# Altium PCB CAADIOPCBV1.01-ADAPTADOR-MICRO-DIP28.PcbDoc
Units mm, origin at the board's own origin, x right, y up, seen from the top; angles counter-clockwise.
Board outline 10.37 x 17.46 mm, 2 copper layers (Top Layer, Bottom Layer); 1 components, 28 nets, 56 pads, 20 vias.
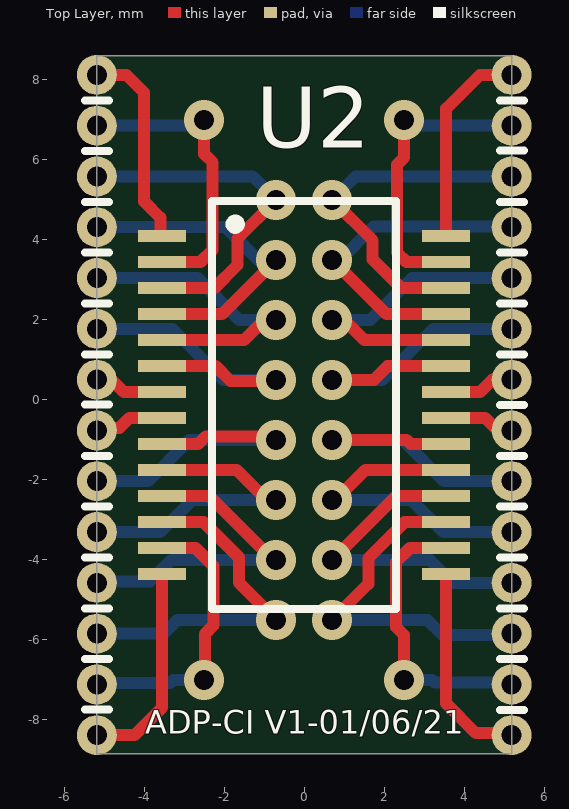
[diagram p0: Top Layer view]
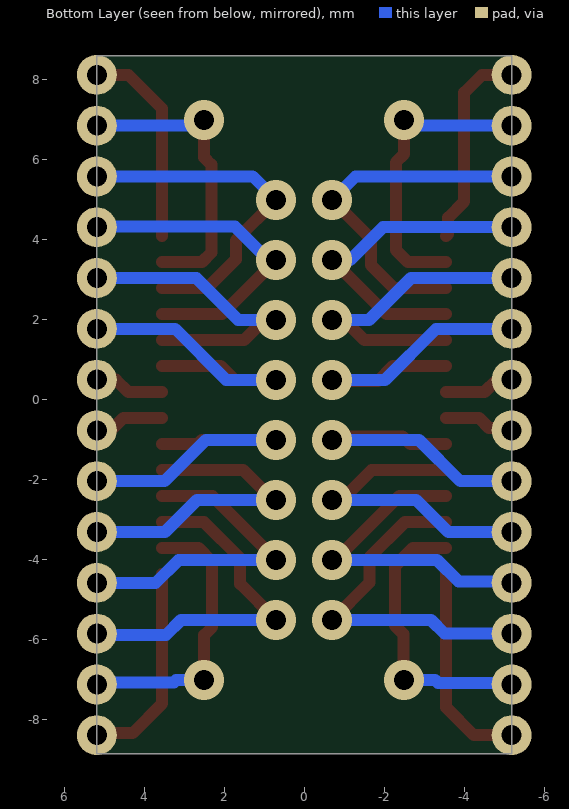
[diagram p1: Bottom Layer view, seen from below]

## Layer stack, top to bottom
Top Solder: solder mask 0.0102, Solder Resist, Dk 3.5
Top Layer: signal copper 0.0356
Dielectric 1: dielectric 0.32, FR-4, Dk 4.8
Bottom Layer: signal copper 0.0356
Bottom Solder: solder mask 0.0102, Solder Resist, Dk 3.5

## Board outline
-5.185,-8.85 -5.185,8.61 5.185,8.61 5.185,-8.85

## Design rules (kind name [scope] priority, off if disabled: settings)
Clearance [All] p1: gap=0.254 ignorepadtopadclearanceinfootprint=FALSE except(0: Arc-Hole Track-Hole SMDPad-Hole THPad-Hole Via-Hole Fill-Hole Poly-Hole Region-Hole Text-Hole)
PolygonConnect [All] p1: connectstyle=Relief reliefconductorwidth=0.254 reliefentries=4 polygonreliefangle="90 Angle" airgapwidth=0.254
RoutingVias [All] p1: holewidth=0.5 width=1 viastyle="Through Hole" minholewidth=0.5 minwidth=1 maxholewidth=0.5 maxwidth=1
SolderMaskExpansion [All] p1: expansion=0.102
Width [All] p1: maxlimit=1 minlimit=0.3 preferedwidth=1 minimp=50.000000 maximp=50.000000 favimp=50.000000
30 further rules are at their usual default settings.

## Components (designator, comment, footprint, x,y, rotation, side; value= is the part's Value field where it differs from the comment)
U2 "PIC18F26K80-I/SS" SSOP-28 0,-0.127 r0 top

## Footprints (in the part's own frame and the unit in brackets; to place one, negate y for a bottom-side part, rotate by r counter-clockwise, add the part's x,y. Pads: shape width x height; smd on the part's side, far side on the other; paste and mask are expansions set on the pad)
SSOP-28 [mm] "28P"
  rect 1.2x0.3 smd: 1(-3.55,4.225) 2(-3.55,3.575) 3(-3.55,2.925) 4(-3.55,2.275) 5(-3.55,1.625) 6(-3.55,0.975) 7(-3.55,0.325) 8(-3.55,-0.325) 9(-3.55,-0.975) 10(-3.55,-1.625) 11(-3.55,-2.275) 12(-3.55,-2.925) 13(-3.55,-3.575) 14(-3.55,-4.225) 15(3.55,-4.225) 16(3.55,-3.575) 17(3.55,-2.925) 18(3.55,-2.275) 19(3.55,-1.625) 20(3.55,-0.975) 21(3.55,-0.325) 22(3.55,0.325) 23(3.55,0.975) 24(3.55,1.625) 25(3.55,2.275) 26(3.55,2.925) 27(3.55,3.575) 28(3.55,4.225)
  silkscreen extent -2.3,-5.1 2.3,5.1, body extent -3.9,-5.1 3.9,5.1, height 2

## Part data
U2: "Microcontrolador", Manufacturer_Name=Microchip, Mouser Part Number=579-PIC18F26K80-I/SS, Arrow Part Number=PIC18F26K80-I/SS, Arrow Price/Stock=https://www.arrow.com/en/products/pic18f26k80-iss/microchip-technology, Datasheet Link=http://docs-emea.rs-online.com/webdocs/0f3b/0900766b80f3b175.pdf, Height=2mm, Manufacturer_Part_Number=PIC18F26K80-I/SS, Mouser Price/Stock=https://www.mouser.co.uk/ProductDetail/Microchip-Technology/PIC18F26K80-I-SS/?qs=LU7oW20kJpONdJWw7q21%2Fw%3D%3D

## Free pads (board coordinates)
  round 1 hole 0.5: 1(-5.185,8.128) 2(-5.185,6.858) 3(-5.185,5.588) 4(-5.185,4.318) 5(-5.185,3.048) 6(-5.185,1.778) 7(-5.185,0.508) 8(-5.185,-0.762) 9(-5.185,-2.032) 10(-5.185,-3.302) 11(-5.185,-4.572) 12(-5.185,-5.842) 13(-5.185,-7.112) 14(-5.185,-8.382) 15(5.185,-8.382) 16(5.185,-7.112) 17(5.185,-5.842) 18(5.185,-4.572) 19(5.185,-3.302) 20(5.185,-2.032) 21(5.185,-0.762) 22(5.185,0.508) 23(5.185,1.778) 24(5.185,3.048) 25(5.185,4.318) 26(5.185,5.588) 27(5.185,6.858) 28(5.185,8.128)

## Via types
v1: diameter 1, hole 0.5, Top Layer to Bottom Layer, 20 vias

## Nets (pads, with @x,y where several pads share a name; then routed paths per layer and width w, separated by ;. In a path a pad name is that pad's centre, name@x,y a point inside that pad or via, vN(x,y) a via of type N, cw(c..) or ccw(c..) an arc to the next point about the centre after c; other vN are vias at no path point)
P1: pad.1 U2.1 | length 5.1
  Top Layer w0.3: pad.1 -4.448,8.128 -4,7.68 -4,4.96 -3.599,4.559 -3.599,4.147 U2.1
P2: pad.2 U2.2 | length 7.5
  Top Layer w0.3: U2.2 -2.592,3.448 -2.29,3.75 -2.29,5.94 -2.5,6.15 v1(-2.5,7)
  Bottom Layer w0.3: pad.2 -2.642,6.858 v1(-2.5,7)
P3: pad.3 U2.3 | length 8.9
  Top Layer w0.3: U2.3 -2.242,2.798 -1.67,3.37 -1.67,4.03 v1(-0.7,5)
  Bottom Layer w0.3: pad.3 -1.288,5.588 v1(-0.7,5)
P4: pad.4 U2.4 | length 8.2
  Top Layer w0.3: U2.4 -2.052,2.148 v1(-0.7,3.5)
  Bottom Layer w0.3: pad.4 -1.968,4.318 -1.15,3.5 v1(-0.7,3.5)
P5: pad.5 U2.5 | length 7.7
  Top Layer w0.3: U2.5 -1.502,1.498 v1@-1,2
  Bottom Layer w0.3: pad.5 -2.668,3.048 -1.62,2 v1(-0.7,2)
P6: pad.6 U2.6 | length 8
  Top Layer w0.3: U2.6 -2.218,0.848 -1.84,0.47 -0.73,0.47 v1(-0.7,0.5)
  Bottom Layer w0.3: pad.6 -3.298,1.778 -2.02,0.5 v1(-0.7,0.5)
P7: pad.7 U2.7 | length 1.8
  Top Layer w0.3: pad.7 -4.818,0.508 -4.508,0.198 U2.7
P8: pad.8 U2.8 | length 1.8
  Top Layer w0.3: pad.8 -5.123,-0.7 -4.62,-0.7 -4.372,-0.452 U2.8
P9: pad.9 U2.9 | length 7.6
  Top Layer w0.3: U2.9 -2.652,-1.102 -2.46,-0.91 -1.09,-0.91 v1@-1,-1
  Bottom Layer w0.3: pad.9 -3.902,-2.032 -2.87,-1 v1(-0.7,-1)
P10: pad.10 U2.10 | length 8
  Top Layer w0.3: U2.10 -1.688,-1.752 -0.94,-2.5 v1(-0.7,-2.5)
  Bottom Layer w0.3: pad.10 -3.602,-3.302 -2.8,-2.5 v1(-0.7,-2.5)
P11: pad.11 U2.11 | length 8.2
  Top Layer w0.3: U2.11 -2.376,-2.402 -0.778,-4 v1(-0.7,-4)
  Bottom Layer w0.3: pad.11 -5.153,-4.54 -3.86,-4.54 -3.32,-4 v1(-0.7,-4)
P12: pad.12 U2.12 | length 8.9
  Top Layer w0.3: U2.12 -2.518,-3.052 -1.63,-3.94 -1.63,-4.57 v1(-0.7,-5.5)
  Bottom Layer w0.3: pad.12 -3.512,-5.842 -3.17,-5.5 v1(-0.7,-5.5)
P13: pad.13 U2.13 | length 7.1
  Top Layer w0.3: U2.13 -2.718,-3.702 -2.27,-4.15 -2.27,-5.64 -2.48,-5.85 -2.48,-6.98 v1(-2.5,-7)
  Bottom Layer w0.3: pad.13 -5.153,-7.08 -3.35,-7.08 -3.27,-7 v1(-2.5,-7)
P14: pad.14 U2.14 | length 5.3
  Top Layer w0.3: pad.14 -4.242,-8.382 -3.55,-7.69 U2.14
P15: pad.15 U2.15 | length 5.2
  Top Layer w0.3: U2.15 3.55,-7.59 4.29,-8.33 5.133,-8.33 pad.15
P16: pad.16 U2.16 | length 7.2
  Top Layer w0.3: v1(2.5,-7) 2.5,-5.88 2.3,-5.68 2.3,-4.045 2.643,-3.702 U2.16
  Bottom Layer w0.3: v1(2.5,-7) 3.2,-7 3.26,-7.06 5.133,-7.06 pad.16
P17: pad.17 U2.17 | length 8.9
  Top Layer w0.3: v1(0.7,-5.5) 1.604,-4.596 1.604,-3.958 2.51,-3.052 U2.17
  Bottom Layer w0.3: v1(0.7,-5.5) 3.08,-5.5 3.46,-5.88 5.147,-5.88 pad.17
P18: pad.18 U2.18 | length 8.2
  Top Layer w0.3: v1(0.7,-4) 2.298,-2.402 U2.18
  Bottom Layer w0.3: v1(0.7,-4) 3.14,-4 3.712,-4.572 pad.18
P19: pad.19 U2.19 | length 8
  Top Layer w0.3: v1(0.7,-2.5) 0.778,-2.5 1.526,-1.752 U2.19
  Bottom Layer w0.3: v1(0.7,-2.5) 2.68,-2.5 3.482,-3.302 pad.19
P20: pad.20 U2.20 | length 7.5
  Top Layer w0.3: v1@1,-1 2.56,-1 2.662,-1.102 U2.20
  Bottom Layer w0.3: v1(0.7,-1) 2.46,-1 3.492,-2.032 pad.20
P21: pad.21 U2.21 | length 1.8
  Top Layer w0.3: U2.21 4.522,-0.452 4.832,-0.762 pad.21
P22: pad.22 U2.22 | length 1.8
  Top Layer w0.3: U2.22 4.398,0.198 4.708,0.508 pad.22
P23: pad.23 U2.23 | length 8
  Top Layer w0.3: v1(0.7,0.5) 1.74,0.5 2.088,0.848 U2.23
  Bottom Layer w0.3: v1(0.7,0.5) 1.95,0.5 3.228,1.778 pad.23
P24: pad.24 U2.24 | length 7.7
  Top Layer w0.3: v1@1,2 1.502,1.498 U2.24
  Bottom Layer w0.3: v1(0.7,2) 1.65,2 2.698,3.048 pad.24
P25: pad.25 U2.25 | length 8.2
  Top Layer w0.3: v1(0.7,3.5) 2.052,2.148 U2.25
  Bottom Layer w0.3: v1(0.7,3.5) 0.9,3.5 1.73,4.33 5.173,4.33 pad.25
P26: pad.26 U2.26 | length 8.8
  Top Layer w0.3: v1(0.7,5) 1.71,3.99 1.71,3.51 2.422,2.798 U2.26
  Bottom Layer w0.3: v1(0.7,5) 1.288,5.588 pad.26
P27: pad.27 U2.27 | length 7.5
  Top Layer w0.3: v1(2.5,7) 2.5,6.06 2.32,5.88 2.32,3.683 2.555,3.448 U2.27
  Bottom Layer w0.3: v1(2.5,7) 2.642,6.858 pad.27
P28: pad.28 U2.28 | length 5.2
  Top Layer w0.3: U2.28 3.55,7.28 4.398,8.128 pad.28

## Silkscreen, mask and mechanical layers (free items; w line width, h text height)
Top Overlay:
  lines w0.2: -5.48,-7.74 -4.88,-7.74 ; -5.48,-6.48 -4.88,-6.48 ; -5.48,-5.21 -4.88,-5.21 ; -5.48,-3.94 -4.88,-3.94 ; -5.48,-2.66 -4.88,-2.66 ; -5.48,-1.4 -4.88,-1.4 ; -5.48,-0.12 -4.88,-0.12 ; -5.48,1.14 -4.88,1.14 ; -5.48,2.41 -4.88,2.41 ; -5.48,3.68 -4.88,3.68 ; -5.48,4.95 -4.88,4.95 ; -5.48,6.22 -4.88,6.22 ; -5.48,7.49 -4.88,7.49 ; 4.89,-7.75 5.49,-7.75 ; 4.89,-6.48 5.49,-6.48 ; 4.89,-5.21 5.49,-5.21 ; 4.89,-3.94 5.49,-3.94 ; 4.89,-2.66 5.49,-2.66 ; 4.89,-1.4 5.49,-1.4 ; 4.89,-0.13 5.49,-0.13 ; 4.89,1.14 5.49,1.14 ; 4.89,2.41 5.49,2.41 ; 4.89,3.68 5.49,3.68 ; 4.89,4.95 5.49,4.95 ; 4.89,6.23 5.49,6.23 ; 4.89,7.49 5.49,7.49
  text "ADP-CI V1-01/06/21" at -3.98,-8.54 h1
Mechanical 13:
  the board outline again, w0.25

## Dimensions
5.185,-8.85 to 5.185,8.61 on Mechanical 1
-5.185,-8.382 to 5.185,-8.382 on Mechanical 1